# EAGLE board Interupt PCB (EAGLE 9.7.0)
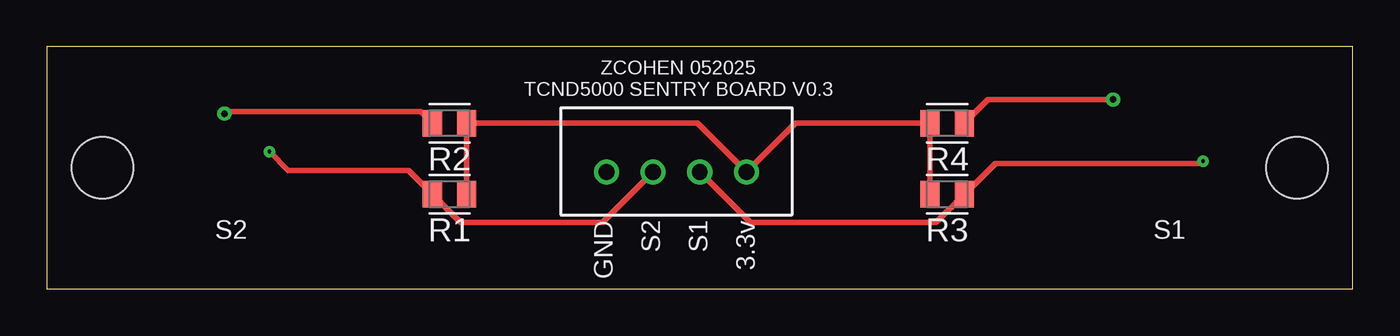
[diagram p0: board, top side]
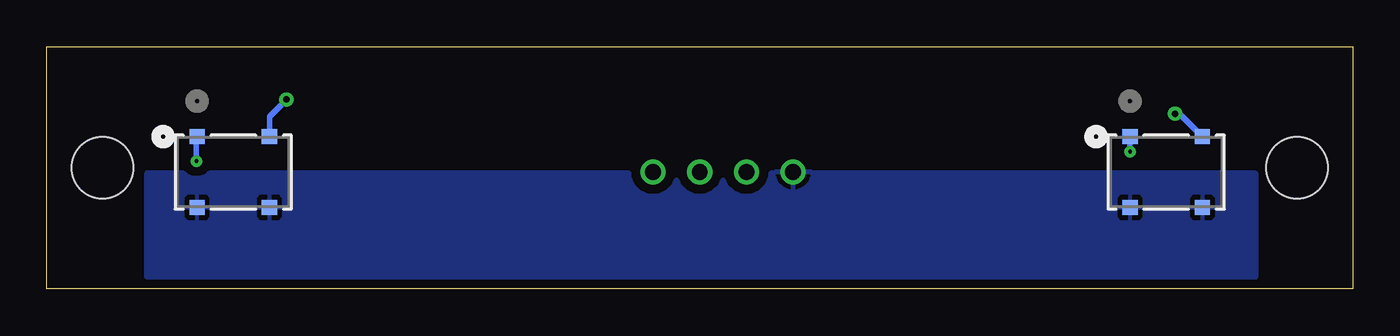
[diagram p1: board, bottom side, seen from below]

Size 70 x 13 mm. Coordinates in mm from the lower left corner, seen from the top.
Outline: 0,0 70,0 70,13 0,13 0,0
Copper layers (1*16): Top / Bottom
Stack-up 2 Layer Stack: Top SilkScreen Epoxy Ink / Top SolderMask SR:Green 0.0254mm Dk 4.3 / Top Surface Finish Lead-Free 0.02mm / Top CuFoil:007 0.035mm / Dielectric-1 Core:084 1.067mm / Bottom CuFoil:007 0.035mm / Bottom Surface Finish Lead-Free 0.02mm / Bottom SolderMask SR:Green 0.0254mm Dk 4.3 / Bottom SilkScreen Epoxy Ink
Design rules: minimum copper width 4mil, minimum drill size 6mil, copper clearance wire_polygon to wire_polygon 4mil, copper clearance wire_polygon to pad_smd 4mil, copper clearance wire_polygon to via 8mil, copper clearance pad_smd to pad_smd 6mil, copper clearance pad_smd to via 4mil, copper clearance via to via 4mil, copper clearance smd to pad (same net) 4mil, copper clearance smd to via (same net) 4mil, copper clearance smd to smd (same net) 6mil, dimension clearance 8mil, via restrict clearance 0mil, restrict clearance 0mil, drill distance 8mil, keepout clearance 0mil
Holes 3.3 mm at 3,6.5 67,6.5

## Footprints (pad centres in the part's own frame; a part is rotated, then mirrored left to right if it is on the bottom)
B4B-XH-A = drill 0.84: 1 0,0; 2 2.5,0; 3 5,0; 4 7.5,0
RESC2012X65 = smd 1.031 x 1.42: 1 -0.919,0; 2 0.919,0
TCND5000 = smd 0.813 x 0.813: 1 -1.94,1.9; 2 -1.94,-1.9; 3 1.94,-1.9; 4 1.94,1.9

## Placement (x,y rotation side)
J1  B4B-XH-A  [B4B-XH-A]  30,6.27 0 top
R1  10k  [RESC2012X65]  21.59,5.08 0 top
R2  100  [RESC2012X65]  21.59,8.89 0 top
R3  10k  [RESC2012X65]  48.26,5.08 180 top
R4  100  [RESC2012X65]  48.26,8.89 180 top
U$1  TCND5000  [TCND5000]  10,6.27 0 bottom
U$2  TCND5000  [TCND5000]  60,6.27 0 bottom

## Library data of the parts
J1 = Connector; CATEGORY: Header; DATASHEET: https://www.jst-mfg.com/product/pdf/eng/eXH.pdf?67404de0bbae1; DESCRIPTION: Connector Header Through Hole 4 position 0.098" (2.50mm); MANUFACTURER: JST Sales America Inc.; MPN: B4B-XH-A; OPERATING_TEMPERATURE: -25°C ~ 85°C; PACKAGE_SIZE: NA; PACKAGE_TYPE: THT; PART_STATUS: ACTIVE; PITCH: 0.098" (2.50mm); ROHS: COMPLIANT; SERIES: XH; SUBCATEGORY: Rectangular Connectors; TYPE: Header-Male Pin-Board to Cable/Wire-Through Hole
R1-R4 = Resistor; CATEGORY: Resistors; DESCRIPTION: Chip Resistor 2.00 X 1.25 X 0.65 mm body 0805(2012-METRIC) Package; PACKAGE_SIZE: 0805; PACKAGE_TYPE: SMD
U$1 U$2 = CohenLibrary

## Nets
+3.3V: J1.4 R1.2 R2.2 R3.2 R4.2
ADC1: J1.2 R1.1 U$1.1
ADC2: J1.3 R3.1 U$2.1
GND: J1.1 U$1.2 U$1.3 U$2.2 U$2.3
N$1: R2.1 U$1.4
N$2: R4.1 U$2.4

## Tracks (layer width: path | path; a pad name or v marks a point on that pad's centre or on a via)
+3.3V
  Top 0.305: R3.2 R4.2 40.12,8.89 J1.4 34.88,8.89 R2.2 R1.2
ADC1  (via drill 0.2)
  Top 0.305: v11.94,7.37 12.95,6.35 19.4,6.35 R1.1 22.2,3.56 29.79,3.56 J1.2
  Bottom 0.305: U$1.1 v11.94,7.37
ADC2  (via drill 0.2)
  Top 0.305: v61.98,6.86 61.98,6.73 50.83,6.73 R3.1 47.66,3.56 37.71,3.56 J1.3
  Bottom 0.305: v61.98,6.86 61.98,8.13 U$2.1
GND
  Bottom 0.305: U$1.2 11.86,4.37 | 61.86,4.37 U$2.2
  pour Bottom (isolate 0.508): 5.08,6.35 5.08,0 64.77,0 64.77,6.35
N$1  (via drill 0.35)
  Top 0.305: R2.1 20.04,9.53 9.65,9.53 v9.53,9.4
  Bottom 0.305: v9.53,9.4 9.29,9.4 U$1.4
N$2  (via drill 0.35)
  Top 0.305: R4.1 50.45,10.16 v57.15,10.16
  Bottom 0.305: v57.15,10.16 58.06,9.25 U$2.4

## Text on the board
SilkscreenTop: ZCOHEN 052025 / TCND5000 SENTRY BOARD V0.3 | GND | S2 | S1 | 3.3v | S2 | S1